# Altium PCB zls-007.PcbDoc
Units mm, origin at the board's own origin, x right, y up, seen from the top; angles counter-clockwise.
Board outline 115 x 124 mm, 2 copper layers (Top Layer, Bottom Layer); 3 components, 0 nets, 40 pads, 0 vias.
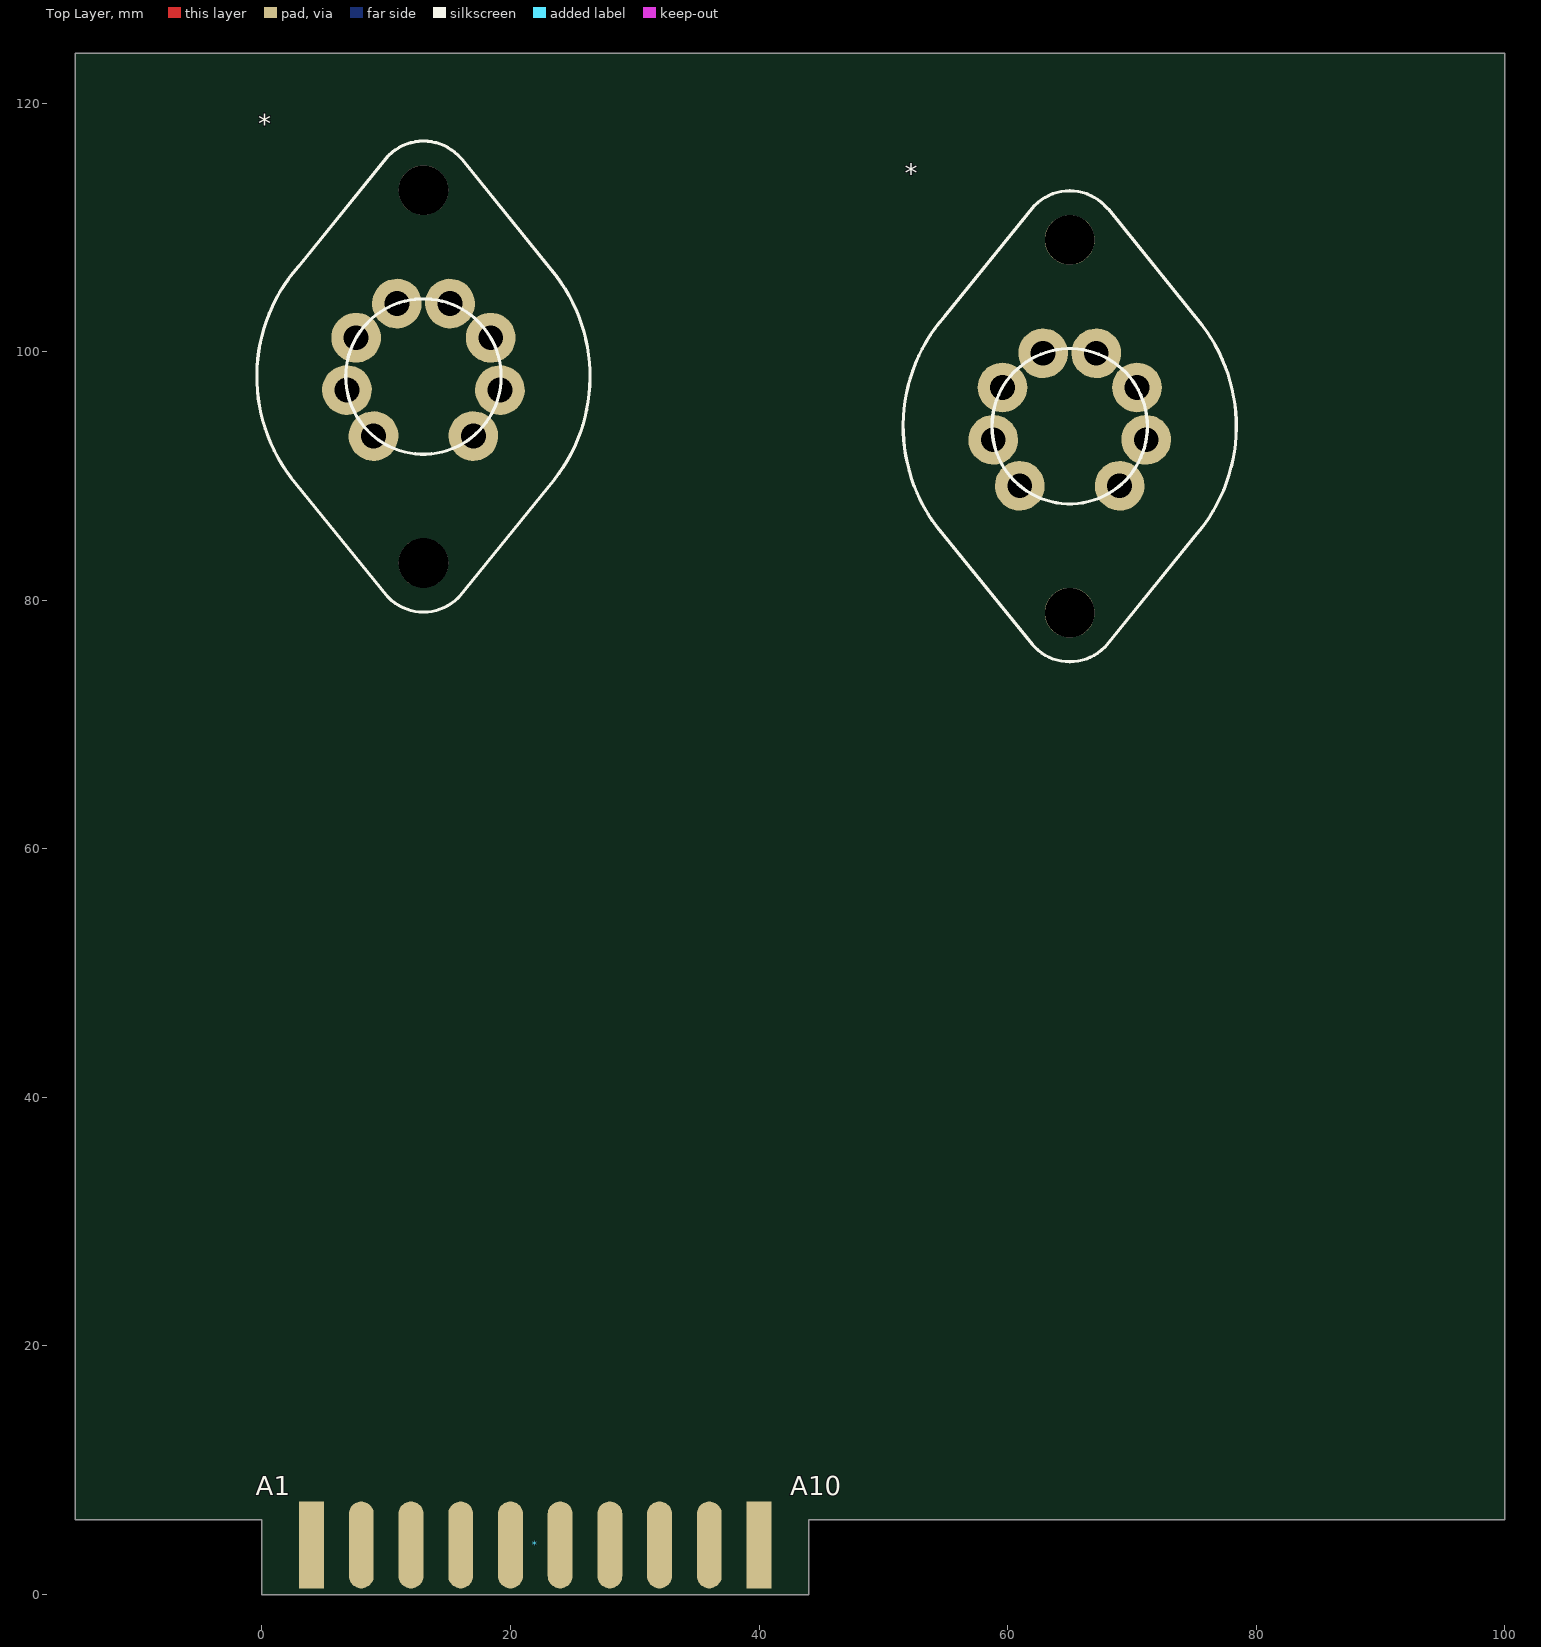
[diagram p0: Top Layer view]
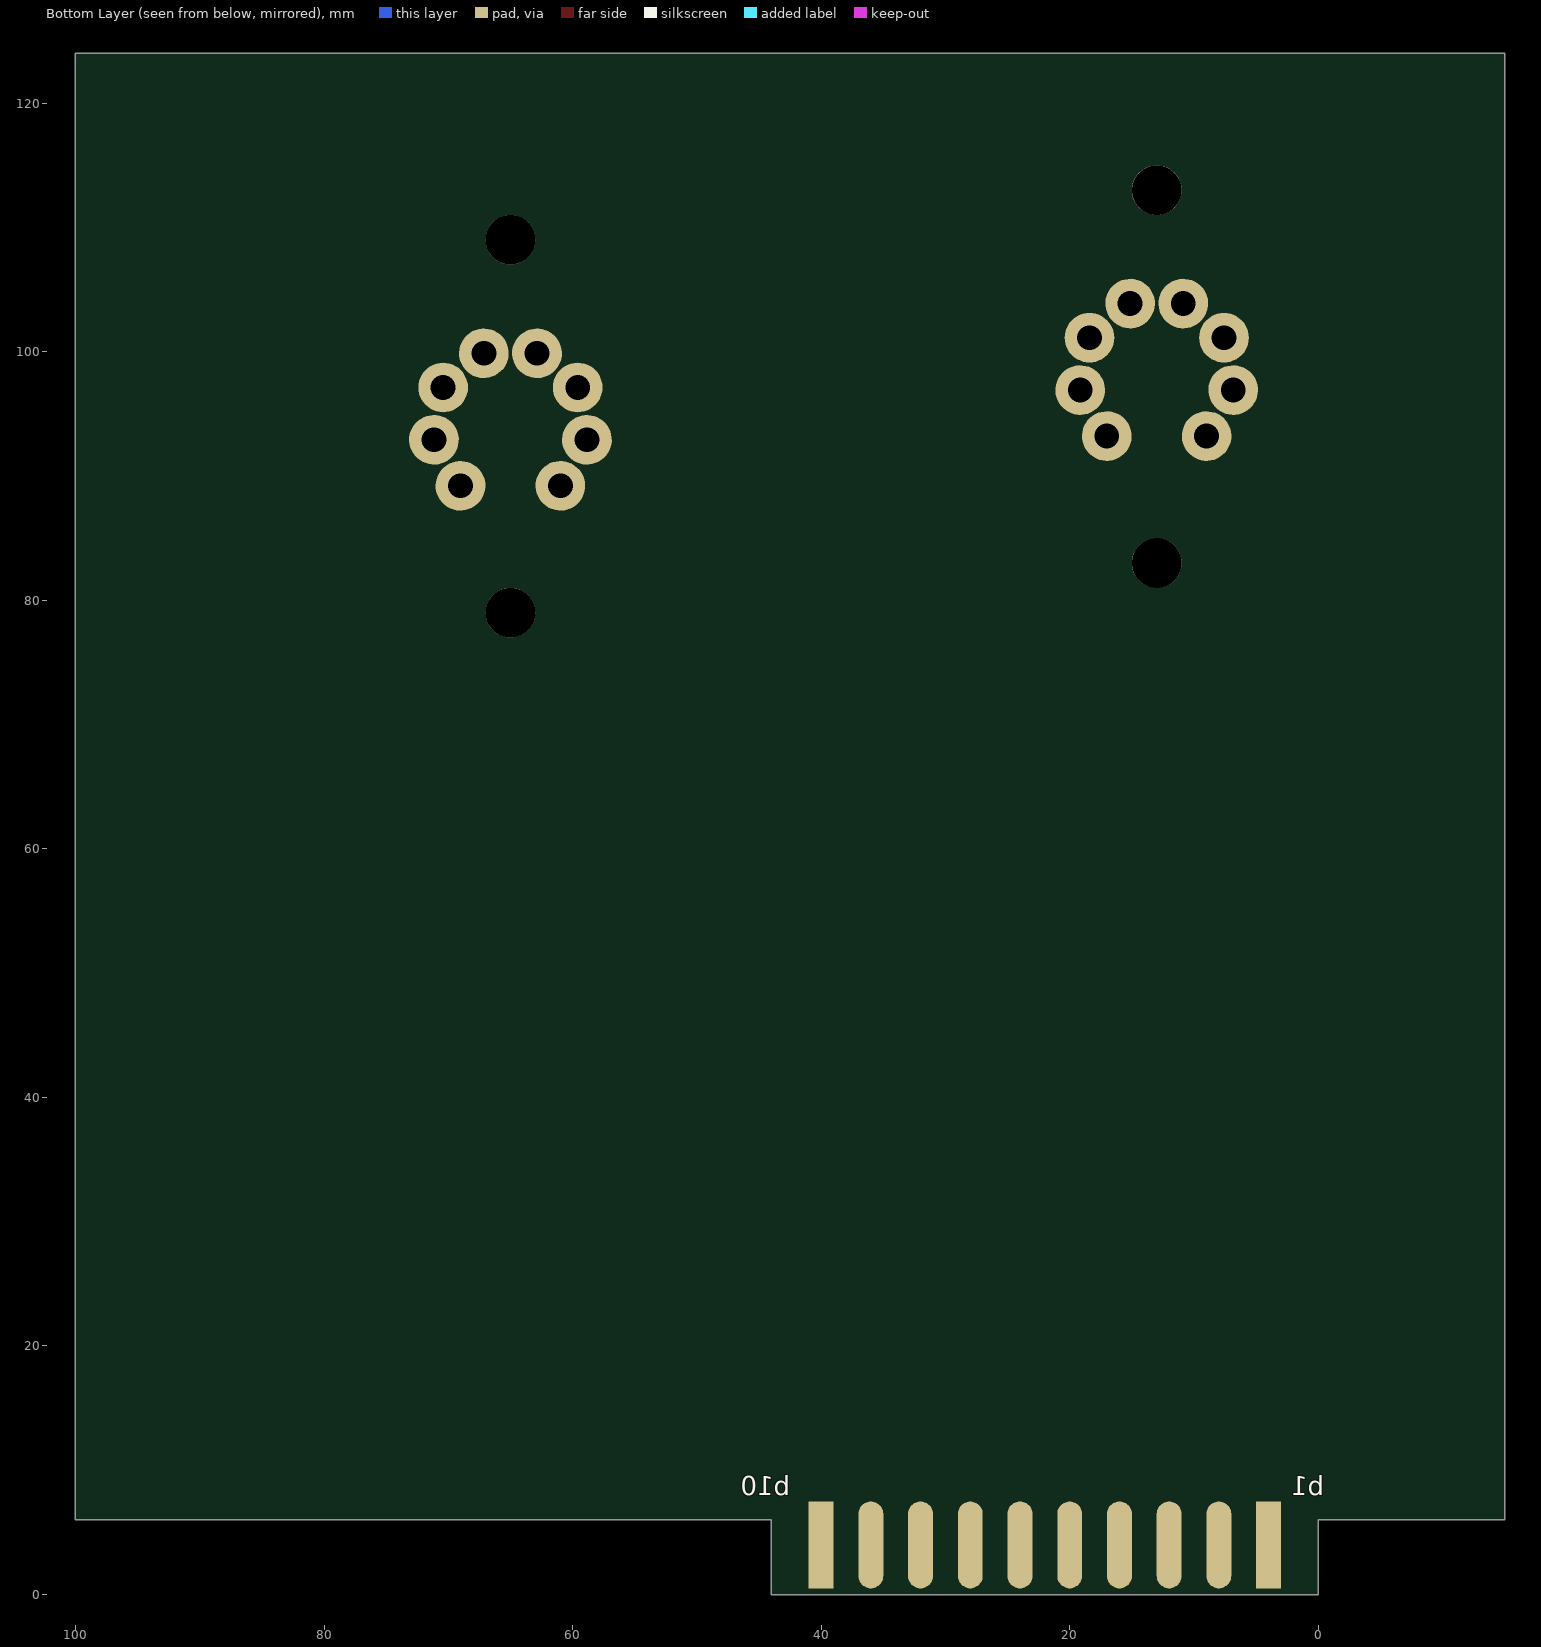
[diagram p1: Bottom Layer view, seen from below]

## Layer stack, top to bottom
Top Solder: solder mask 0.0102, Solder Resist, Dk 3.5
Top Layer: signal copper 0.0356
Dielectric 1: dielectric 0.32, FR-4, Dk 4.8
Bottom Layer: signal copper 0.0356
Bottom Solder: solder mask 0.0102, Solder Resist, Dk 3.5

## Board outline
-15,124 -15,6 0,6 0,0 44,0 44,6 100,6 100,124

## Design rules (kind name [scope] priority, off if disabled: settings)
Clearance [All] p1: gap=0.254 ignorepadtopadclearanceinfootprint=FALSE except(0: Arc-Hole Track-Hole SMDPad-Hole THPad-Hole Via-Hole Fill-Hole Poly-Hole Region-Hole Text-Hole)
PolygonConnect [All] p1: connectstyle=Relief reliefconductorwidth=0.254 reliefentries=4 polygonreliefangle="90 Angle" airgapwidth=0.254
RoutingVias [All] p1: holewidth=0.711 width=1.27 viastyle="Through Hole" minholewidth=0.711 minwidth=1.27 maxholewidth=0.711 maxwidth=1.27
SolderMaskExpansion [All] p1: expansion=0.102
Width [All] p1: maxlimit=0.254 minlimit=0.254 preferedwidth=0.254
30 further rules are at their usual default settings.

## Classes and differential pairs
component class ZLS-007: *

## Components (designator, comment, footprint, x,y, rotation, side; value= is the part's Value field where it differs from the comment)
* "PA12" TO-3-8 65,109 r90 top
* "PA12" TO-3-8 13,113 r90 top
* "Edge 20" "Edge Connector 20" 4,4 r0 top

## Footprints (in the part's own frame and the unit in brackets; to place one, negate y for a bottom-side part, rotate by r counter-clockwise, add the part's x,y. Pads: shape width x height; smd on the part's side, far side on the other; paste and mask are expansions set on the pad)
"Edge Connector 20" [mm]
  rect 2x7 smd: A1(0,0) A10(36,0)
  oval 2x7 smd: A2(4,0) A3(8,0) A4(12,0) A5(16,0) A6(20,0) A7(24,0) A8(28,0) A9(32,0)
  rect 2x7 smd far side: B1(0,0) B10(36,0)
  oval 2x7 smd far side: B2(4,0) B3(8,0) B4(12,0) B5(16,0) B6(20,0) B7(24,0) B8(28,0) B9(32,0)
TO-3-8 [mm]
  round 4 hole 2: 1(-19.788,-4.017) 2(-16.085,-6.155) 3(-11.875,-5.413) 4(-9.127,-2.138) 5(-9.127,2.138) 6(-11.875,5.413) 7(-16.085,6.155) 8(-19.788,4.017)
  round 4 hole 4: ""(-30,0) ""(0,0)
  silkscreen extent -33.95,-13.4 3.95,13.4

## Part data
* *: Supplier Part Number 1=7165915, Supplier 1=RSComponents

## Nets (pads, with @x,y where several pads share a name; then routed paths per layer and width w, separated by ;. In a path a pad name is that pad's centre, name@x,y a point inside that pad or via, vN(x,y) a via of type N, cw(c..) or ccw(c..) an arc to the next point about the centre after c; other vN are vias at no path point)
pads on no net: *. *.1 *.2 *.3 *.4 *.5 *.6 *.7 *.8 *.A1 *.A2 *.A3 *.A4 *.A5 *.A6 *.A7 *.A8 *.A9 *.A10 *.B1 *.B2 *.B3 *.B4 *.B5 *.B6 *.B7 *.B8 *.B9 *.B10

## Text inside footprints (layer, text, board x,y; h text height)
*: Top Overlay "A1" at -0.5,8 h1.52; Top Overlay "A10" at 42.5,8 h1.52; Bottom Overlay "b1" at -0.5,8 h1.52; Bottom Overlay "b10" at 42.5,8 h1.52